# Altium PCB USB2JTAG.PcbDoc (part 1 of 2)
Units mm, origin at the board's own origin, x right, y up, seen from the top; angles counter-clockwise.
Board outline 52 x 33 mm, 2 copper layers (Top Layer, Bottom Layer), stack 1.535 mm thick; 102 components, 81 nets, 369 pads, 123 vias.
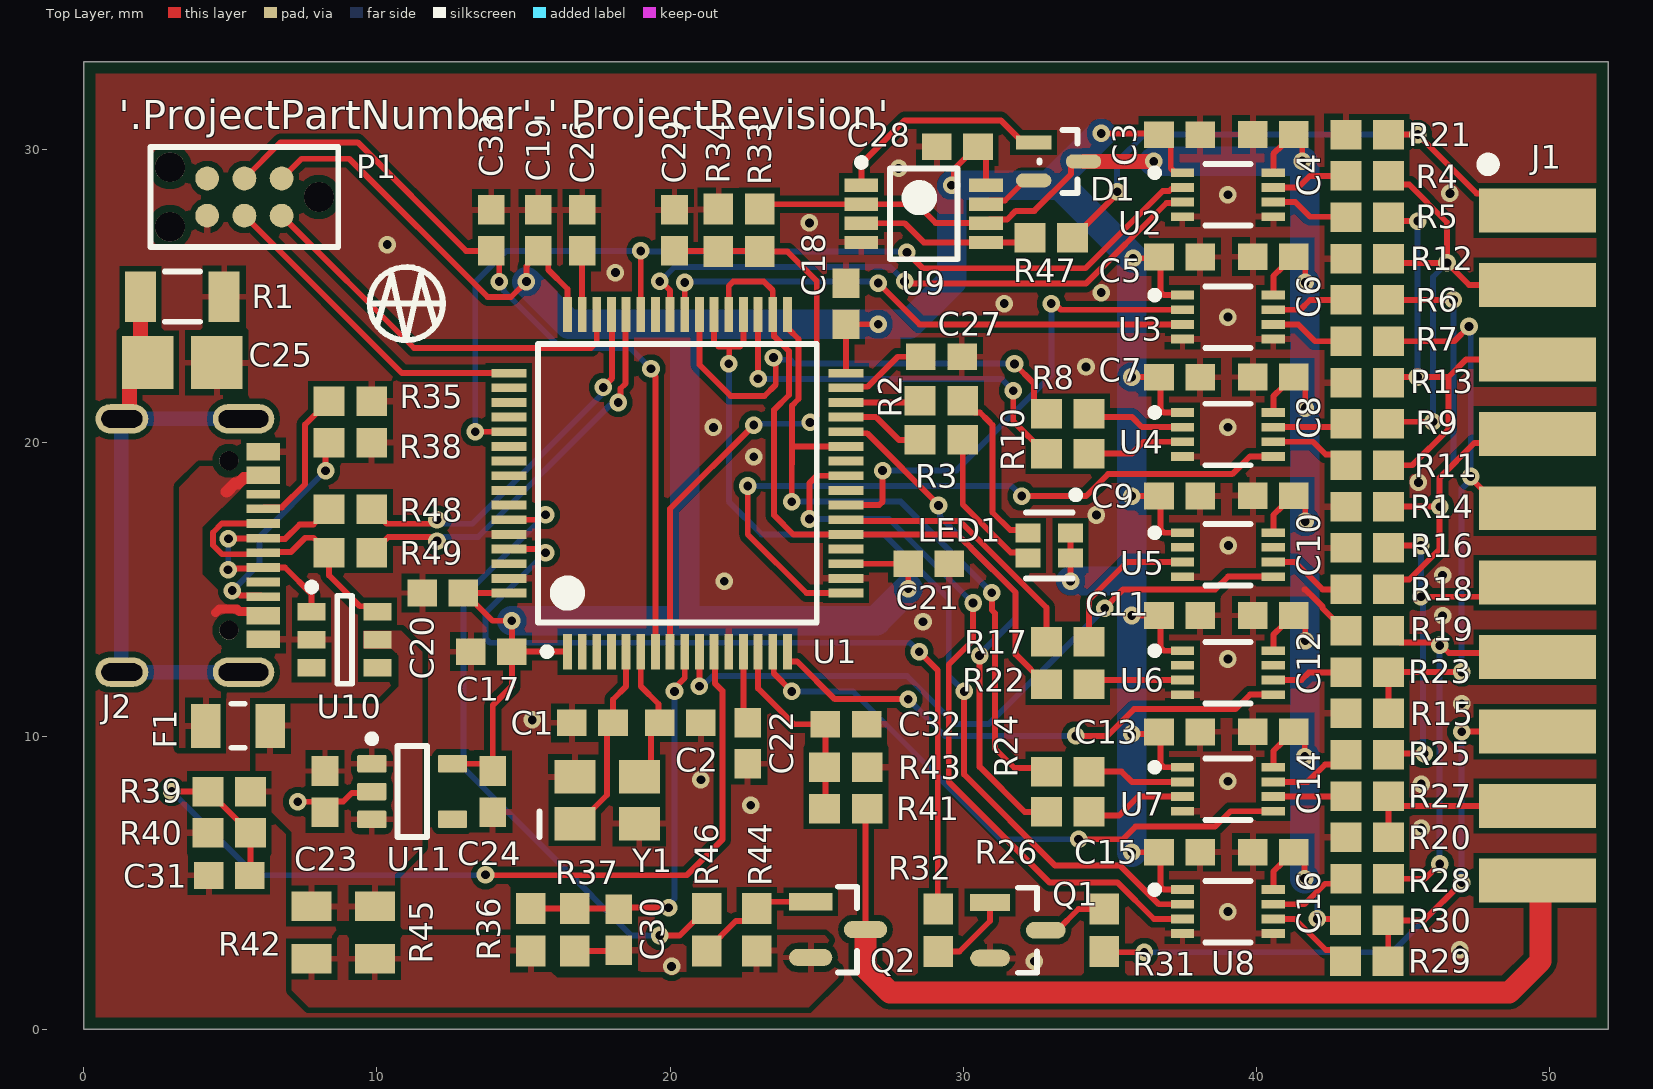
[diagram p0: Top Layer view]
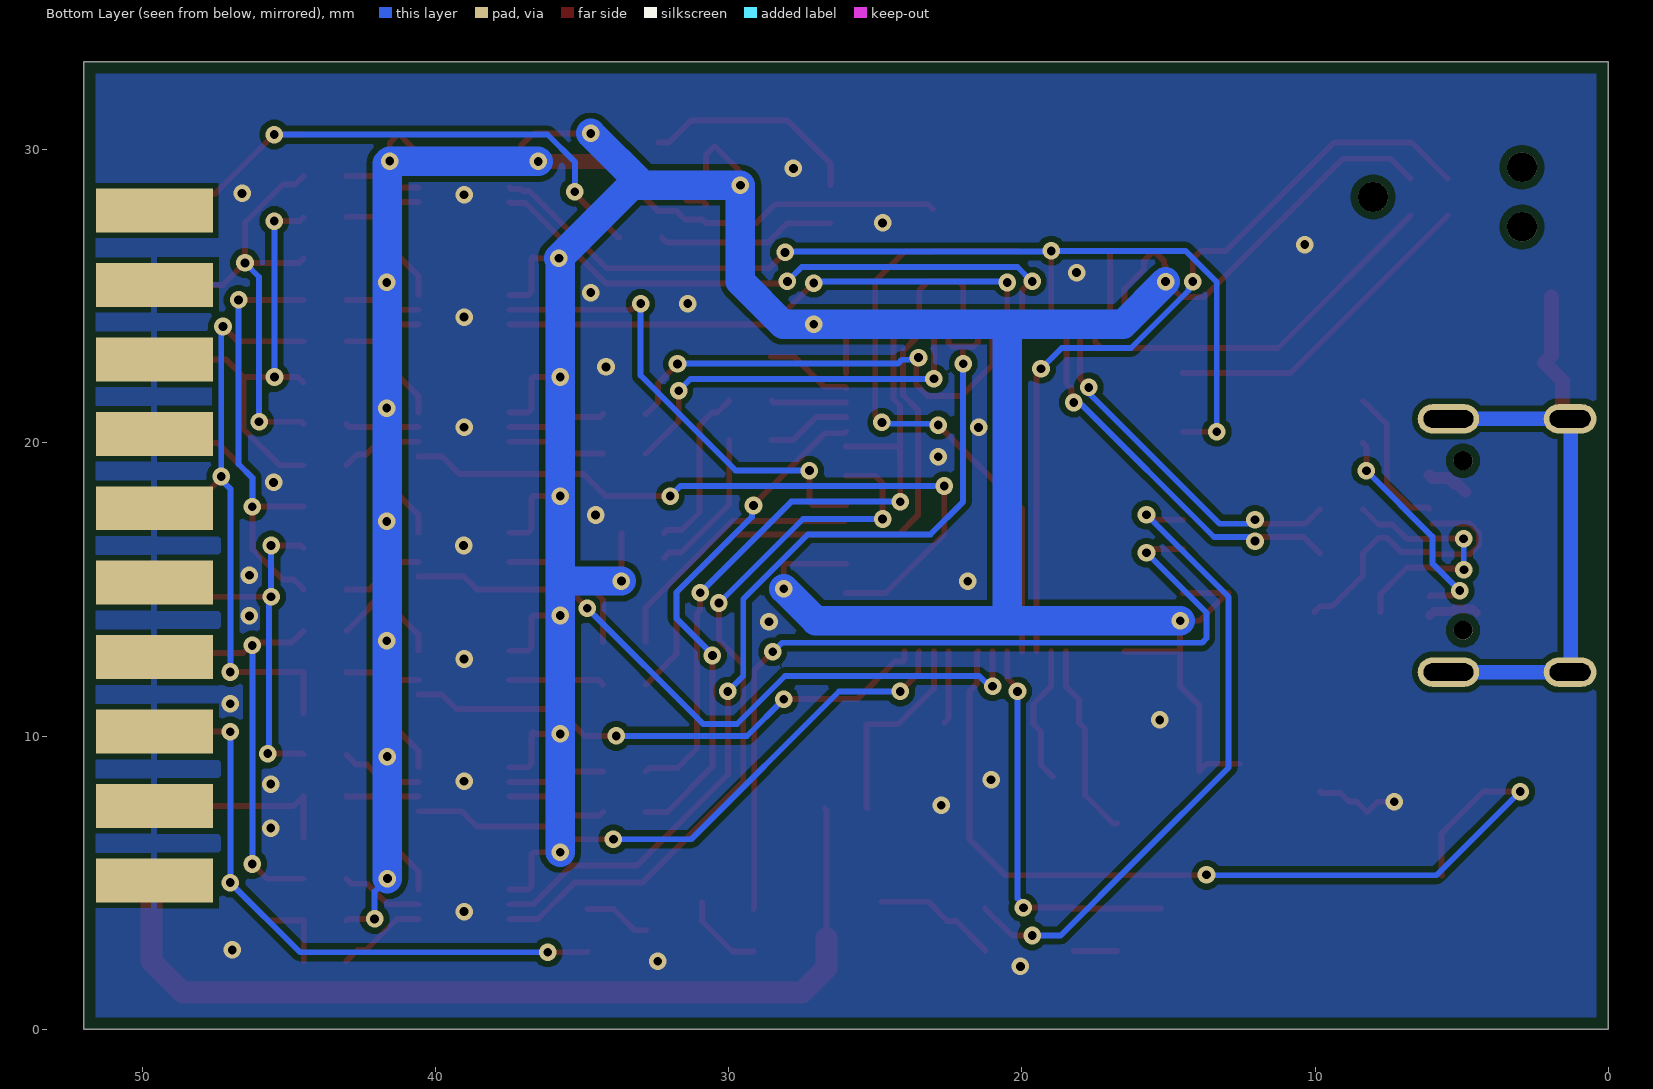
[diagram p1: Bottom Layer view, seen from below]
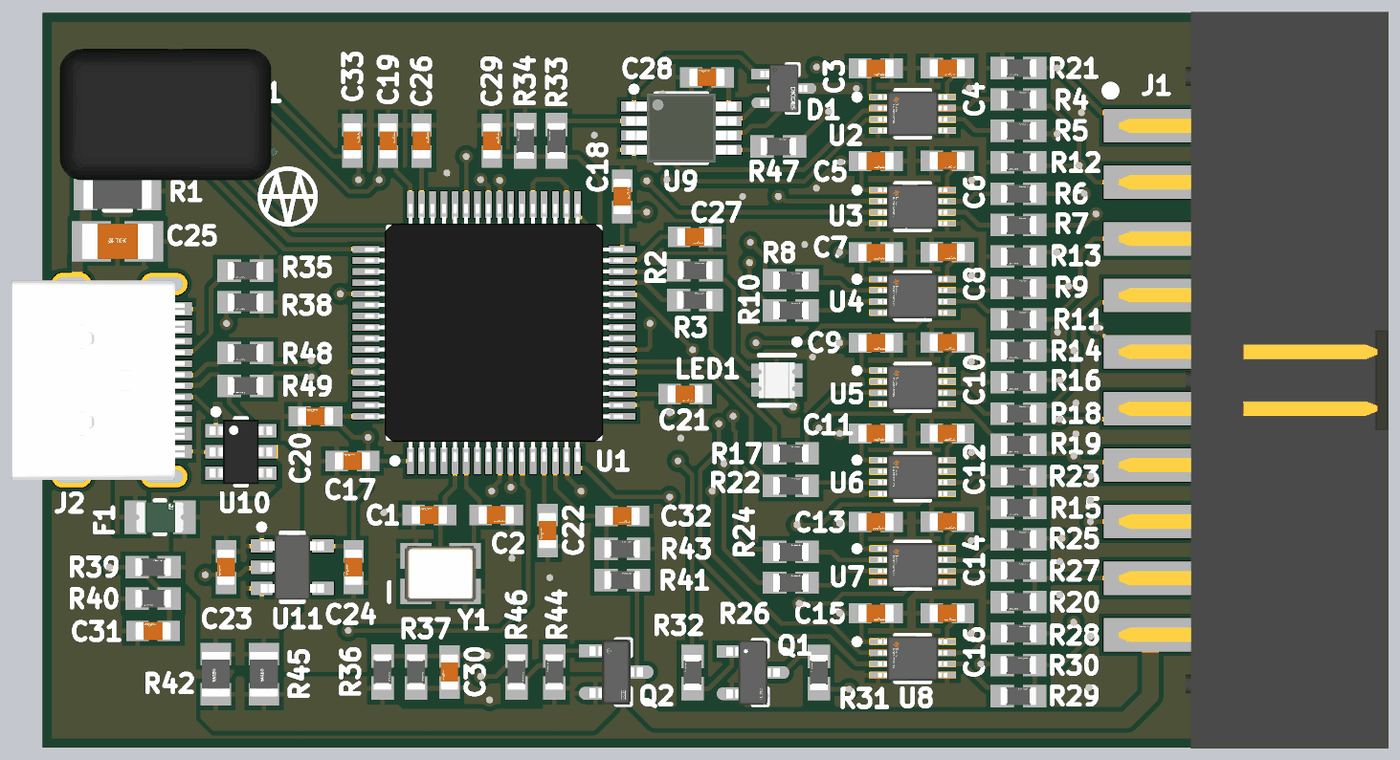
[diagram p2: 3D render of the assembled board from above, using the file's embedded part models]

## Layer stack, top to bottom
Top Solder: solder mask 0.0102, Solder Resist, Dk 3.5
Top Layer: signal copper 0.018
Dielectric 1: core 1.4986, Core-043, Dk 4.3
Bottom Layer: signal copper 0.018
Bottom Solder: solder mask 0.0102, Solder Resist, Dk 3.5

## Board outline
0,0 0,33 52,33 52,0

## Design rules (kind name [scope] priority, off if disabled: settings)
AcuteAngle [All] p1: minimum=3.50000000000000E+0001 checktracksonly=FALSE
BoardOutlineClearance "BoardOutlineClearance 1" [All] p1 off: gap=0.25 ignorepadtopadclearanceinfootprint=FALSE except(0: Arc-SplitContinuation Track-SplitContinuation SMDPad-SplitContinuation THPad-SplitContinuation Via-SplitContinuation Fill-SplitContinuation Poly-SplitContinuation Region-SplitContinuation Text-SplitContinuation) // Milling
BoardOutlineClearance "BoardOutlineClearance 2" [All] p2: gap=0.4 ignorepadtopadclearanceinfootprint=FALSE except(0: Arc-SplitContinuation Track-SplitContinuation SMDPad-SplitContinuation THPad-SplitContinuation Via-SplitContinuation Fill-SplitContinuation Poly-SplitContinuation Region-SplitContinuation Text-SplitContinuation) // V-Cut
Clearance "Clearance-1 1/2 Oz" [All] p1: gap=0.127 ignorepadtopadclearanceinfootprint=FALSE except(0.2: Arc-Fill Arc-Poly Track-Fill Track-Poly SMDPad-SMDPad SMDPad-Fill SMDPad-Poly THPad-Fill THPad-Poly Via-Fill Via-Poly Fill-Fill Fill-Poly Poly-Poly Poly-Region Poly-Text; 0.25: Arc-Hole Track-Hole SMDPad-Hole THPad-Hole Via-Hole Fill-Hole Poly-Hole Region-Hole Text-Hole) // Standart
Clearance "Clearance-2 1/2 Oz" [All] p2 off: gap=0.1 ignorepadtopadclearanceinfootprint=FALSE except(0.15: Arc-Fill Arc-Poly Track-Fill Track-Poly SMDPad-SMDPad SMDPad-Fill SMDPad-Poly THPad-Fill THPad-Poly Via-Fill Via-Poly Fill-Fill Fill-Poly Poly-Poly Poly-Region Poly-Text; 0.25: Arc-Hole Track-Hole SMDPad-Hole THPad-Hole Via-Hole Fill-Hole Poly-Hole Region-Hole Text-Hole) // Advance
Clearance "Clearance-1 1 Oz" [All] p3 off: gap=0.2 ignorepadtopadclearanceinfootprint=FALSE except(0.25: Arc-Hole Track-Hole SMDPad-Hole THPad-Hole Via-Hole Fill-Hole Poly-Hole Region-Hole Text-Hole) // Standart
Clearance "Clearance-2 1 Oz" [All] p4 off: gap=0.15 ignorepadtopadclearanceinfootprint=FALSE except(0.2: Arc-Fill Arc-Poly Track-Fill Track-Poly SMDPad-Fill SMDPad-Poly THPad-Fill THPad-Poly Via-Fill Via-Poly Fill-Fill Fill-Poly Poly-Poly; 0.25: Arc-Hole Track-Hole SMDPad-Hole THPad-Hole Via-Hole Fill-Hole Poly-Hole Region-Hole Text-Hole) // Advance
Clearance "Clearance 2 Oz" [All] p5 off: gap=0.3 ignorepadtopadclearanceinfootprint=FALSE except(0.25: Arc-Hole Track-Hole SMDPad-Hole THPad-Hole Via-Hole Fill-Hole Poly-Hole Region-Hole Text-Hole)
Clearance "Clearance 3 Oz" [All] p6 off: gap=0.35 ignorepadtopadclearanceinfootprint=FALSE except(0.25: Arc-Hole Track-Hole SMDPad-Hole THPad-Hole Via-Hole Fill-Hole Poly-Hole Region-Hole Text-Hole)
DiffPairsRouting "DiffPairsRouting 1/2 Oz" [All] p1: maxlimit=0.254 minlimit=0.1 mostfreqgap=0.254 toplayer_minwidth=0.1 toplayer_maxwidth=0.381 toplayer_prefwidth=0.381 bottomlayer_minwidth=0.1 bottomlayer_maxwidth=0.381 bottomlayer_prefwidth=0.381 maxuncoupledlength=12.7
DiffPairsRouting "DiffPairsRouting 1 Oz" [All] p2 off: maxlimit=0.254 minlimit=0.2 mostfreqgap=0.254 toplayer_minwidth=0.2 toplayer_maxwidth=0.381 toplayer_prefwidth=0.381 bottomlayer_minwidth=0.2 bottomlayer_maxwidth=0.381 bottomlayer_prefwidth=0.381 maxuncoupledlength=12.7
Height [All] p1: minheight=0 maxheight=50 prefheight=12.7
HoleSize "Minimum HoleSize" [IsPad] p1: absolutevalues=TRUE maxlimit=5.9 minlimit=0.6 maxpercent=80.000 minpercent=20.000
HoleSize "Minimum HoleSize VIA 1" [IsVia] p2: absolutevalues=TRUE maxlimit=5.9 minlimit=0.3 maxpercent=80.000 minpercent=20.000 // Standart
HoleSize "Minimum HoleSize VIA 2" [IsVia] p3 off: absolutevalues=TRUE maxlimit=5.9 minlimit=0.2 maxpercent=80.000 minpercent=20.000 // Advance
HoleToHoleClearance Hole2HoleClearance [All] p1: gap=0.25 allowstackedmicrovias=FALSE
MinimumAnnularRing "Minimum AR VIA Standart" [All] p1: minimumring=0.15
MinimumAnnularRing "Minimum AR PAD Standart" [All] p2: minimumring=0.2
MinimumAnnularRing "Minimum AR VIA Advance" [All] p3 off: minimumring=0.1
MinimumAnnularRing "Minimum AR PAD Advance" [All] p4 off: minimumring=0.15
MinimumSolderMaskSliver "SolderMask Bridge Standart" [All] p1: minsoldermaskwidth=0.15 // All Masks
MinimumSolderMaskSliver "SolderMask Bridge Advance" [All] p2 off: minsoldermaskwidth=0.1 // Mask LDI
PlaneClearance "PlaneClearance-1 1/2 Oz" [All] p1: clearance=0.2 // Standart
PlaneClearance "PlaneClearance-2 1/2 Oz" [All] p2 off: clearance=0.15 // Advance
PlaneClearance "PlaneClearance 1 Oz" [All] p3 off: clearance=0.2
PlaneClearance "PlaneClearance 2 Oz" [All] p4 off: clearance=0.3
PlaneClearance "PlaneClearance 3 Oz" [All] p5 off: clearance=0.35
PlaneConnect "TermalConnect-1 1/2 Oz" [All] p1: planeconnectstyle=Relief reliefexpansion=0.2 reliefentries=4 reliefconductorwidth=0.2 reliefairgap=0.2 // Standart
PlaneConnect "TermalConnect-2 1/2 Oz" [All] p2 off: pad.planeconnectstyle=Relief pad.reliefexpansion=0.15 pad.reliefentries=4 pad.reliefconductorwidth=0.15 pad.reliefairgap=0.15 via.planeconnectstyle=Direct via.reliefexpansion=0.15 via.reliefentries=4 via.reliefconductorwidth=0.15 via.reliefairgap=0.15 // Advance
PlaneConnect "TermalConnect-1 1 Oz" [All] p3 off: planeconnectstyle=Relief reliefexpansion=0.2 reliefentries=4 reliefconductorwidth=0.2 reliefairgap=0.2 // Standart
PlaneConnect "TermalConnect-2 1 Oz" [All] p4 off: pad.planeconnectstyle=Relief pad.reliefexpansion=0.15 pad.reliefentries=4 pad.reliefconductorwidth=0.2 pad.reliefairgap=0.2 via.planeconnectstyle=Direct via.reliefexpansion=0.15 via.reliefentries=4 via.reliefconductorwidth=0.15 via.reliefairgap=0.15 // Advance
PlaneConnect "TermalConnect 2 Oz" [All] p5 off: planeconnectstyle=Relief reliefexpansion=0.2 reliefentries=4 reliefconductorwidth=0.3 reliefairgap=0.3 // Standart
PlaneConnect "TermalConnect 3 Oz" [All] p6 off: planeconnectstyle=Relief reliefexpansion=0.2 reliefentries=4 reliefconductorwidth=0.35 reliefairgap=0.35 // Standart
PolygonConnect "PolygonConnect-1 1/2 Oz" [All] p1: thpad.connectstyle=Relief thpad.reliefconductorwidth=0.15 thpad.reliefentries=4 thpad.polygonreliefangle="90 Angle" thpad.airgapwidth=0.2 smdpad.connectstyle=Relief smdpad.reliefconductorwidth=0.2 smdpad.reliefentries=4 smdpad.polygonreliefangle="90 Angle" smdpad.airgapwidth=0.2 via.connectstyle=Direct via.reliefconductorwidth=0.254 via.reliefentries=4 via.polygonreliefangle="90 Angle" via.airgapwidth=0.254 // Standart
PolygonConnect "PolygonConnect-1 1 Oz" [All] p2 off: thpad.connectstyle=Relief thpad.reliefconductorwidth=0.2 thpad.reliefentries=4 thpad.polygonreliefangle="90 Angle" thpad.airgapwidth=0.2 smdpad.connectstyle=Relief smdpad.reliefconductorwidth=0.2 smdpad.reliefentries=4 smdpad.polygonreliefangle="90 Angle" smdpad.airgapwidth=0.2 via.connectstyle=Direct via.reliefconductorwidth=0.254 via.reliefentries=4 via.polygonreliefangle="90 Angle" via.airgapwidth=0.254 // Standart
PolygonConnect "PolygonConnect-2 1/2 Oz" [All] p3 off: thpad.connectstyle=Relief thpad.reliefconductorwidth=0.125 thpad.reliefentries=4 thpad.polygonreliefangle="90 Angle" thpad.airgapwidth=0.15 smdpad.connectstyle=Relief smdpad.reliefconductorwidth=0.125 smdpad.reliefentries=4 smdpad.polygonreliefangle="90 Angle" smdpad.airgapwidth=0.15 via.connectstyle=Direct via.reliefconductorwidth=0.254 via.reliefentries=4 via.polygonreliefangle="90 Angle" via.airgapwidth=0.254 // Advance
PolygonConnect "PolygonConnect-2 1 Oz" [All] p4 off: thpad.connectstyle=Relief thpad.reliefconductorwidth=0.15 thpad.reliefentries=4 thpad.polygonreliefangle="90 Angle" thpad.airgapwidth=0.15 smdpad.connectstyle=Relief smdpad.reliefconductorwidth=0.15 smdpad.reliefentries=4 smdpad.polygonreliefangle="90 Angle" smdpad.airgapwidth=0.15 via.connectstyle=Direct via.reliefconductorwidth=0.254 via.reliefentries=4 via.polygonreliefangle="90 Angle" via.airgapwidth=0.254 // Advance
PolygonConnect "PolygonConnect 2 Oz" [All] p5 off: thpad.connectstyle=Relief thpad.reliefconductorwidth=0.3 thpad.reliefentries=4 thpad.polygonreliefangle="90 Angle" thpad.airgapwidth=0.3 smdpad.connectstyle=Relief smdpad.reliefconductorwidth=0.3 smdpad.reliefentries=4 smdpad.polygonreliefangle="90 Angle" smdpad.airgapwidth=0.3 via.connectstyle=Direct via.reliefconductorwidth=0.254 via.reliefentries=4 via.polygonreliefangle="90 Angle" via.airgapwidth=0.254
PolygonConnect "PolygonConnect 3 Oz" [All] p6 off: thpad.connectstyle=Relief thpad.reliefconductorwidth=0.35 thpad.reliefentries=4 thpad.polygonreliefangle="90 Angle" thpad.airgapwidth=0.35 smdpad.connectstyle=Relief smdpad.reliefconductorwidth=0.35 smdpad.reliefentries=4 smdpad.polygonreliefangle="90 Angle" smdpad.airgapwidth=0.35 via.connectstyle=Direct via.reliefconductorwidth=0.254 via.reliefentries=4 via.polygonreliefangle="90 Angle" via.airgapwidth=0.254
RoutingCorners [All] p1 off: cornerstyle=45-Degree minsetback=2.54 maxsetback=2.54
RoutingVias [All] p1: holewidth=0.3 width=0.6 viastyle="Through Hole" minholewidth=0.2 minwidth=0.4 maxholewidth=5.9 maxwidth=6.4
SilkToSilkClearance Silk2SilkClearance [All] p1 off: silktosilkclearance=0.15
SilkToSolderMaskClearance Silk2SolderMaskClearance [IsPad] p1 off: minsilkscreentomaskgap=0.15 clearancetoexposedcopper=TRUE
SolderMaskExpansion [IsVia] p1: expansion=0.102 istentingtop=TRUE
SolderMaskExpansion SolderMaskExpansion-1 [All] p2: expansion=0.05 istentingtop=FALSE // Standart
SolderMaskExpansion "SolderMaskExpansion LDI" [All] p3 off: expansion=0.025 istentingtop=FALSE // Advance
UnRoutedNet [All] p1: checkbadconnections=TRUE
Width "Width 1/2 Oz" [All] p1: maxlimit=10 minlimit=0.127 preferedwidth=0.2 checkconnectedcopper=TRUE
Width "Width 1 Oz" [All] p2 off: maxlimit=10 minlimit=0.15 preferedwidth=0.2 checkconnectedcopper=TRUE
Width "Width 3 Oz" [All] p3 off: maxlimit=10 minlimit=0.35 preferedwidth=0.4 checkconnectedcopper=TRUE
Width "Width 2 Oz" [All] p4 off: maxlimit=10 minlimit=0.3 preferedwidth=0.35 minimp=50.000000 maximp=50.000000 favimp=50.000000 checkconnectedcopper=TRUE
19 further rules are at their usual default settings.

## Classes and differential pairs
component class USB2JTAG-Power: C23 C24 C25 C28 C29 C30 C31 C32 D1 F1 J2 Q2 R1 R33 R34 R35 R36 R37 R38 R39 R40 R41 R42 R43 R44 R45 R46 R47 R48 R49 U9 U10 U11
component class USB2JTAG-Interfaces: C3 C4 C5 C6 C7 C8 C9 C10 C11 C12 C13 C14 C15 C16 J1 Q1 R4 R5 R6 R7 R8 R9 R10 R11 R12 R13 R14 R15 R16 R17 R18 R19 R20 R21 R22 R23 R24 R25 R26 R27 R28 R29 R30 R31 R32 U2 U3 U4 U5 U6 U7 U8
component class USB2JTAG-MCU: C1 C2 C17 C18 C19 C20 C21 C22 C26 C27 C33 LED1 P1 R2 R3 U1 Y1
differential pair USB_D: +USB_D_P -USB_D_N
differential pair D: +D_P -D_N

## Components (designator, comment, footprint, x,y, rotation, side; value= is the part's Value field where it differs from the comment)
C1 "?uF 6V 0603" FP-GRM188-0_1-e0_2_0_55-IPC_B-NOSILK 17.35,10.452 r180 top
C2 "?uF 6V 0603" FP-GRM188-0_1-e0_2_0_55-IPC_B-NOSILK 20.35,10.452 r0 top
C3 "?uF 6V 0603" FP-GRM188-0_1-e0_2_0_55-IPC_B-NOSILK 37.378,30.506 r0 top
C4 "?uF 6V 0603" FP-GRM188-0_1-e0_2_0_55-IPC_B-NOSILK 40.578,30.517 r0 top
C5 "?uF 6V 0603" FP-GRM188-0_1-e0_2_0_55-IPC_B-NOSILK 37.378,26.34 r0 top
C6 "?uF 6V 0603" FP-GRM188-0_1-e0_2_0_55-IPC_B-NOSILK 40.578,26.351 r0 top
C7 "?uF 6V 0603" FP-GRM188-0_1-e0_2_0_55-IPC_B-NOSILK 37.378,22.237 r0 top
C8 "?uF 6V 0603" FP-GRM188-0_1-e0_2_0_55-IPC_B-NOSILK 40.578,22.248 r0 top
C9 "?uF 6V 0603" FP-GRM188-0_1-e0_2_0_55-IPC_B-NOSILK 37.378,18.184 r0 top
C10 "?uF 6V 0603" FP-GRM188-0_1-e0_2_0_55-IPC_B-NOSILK 40.578,18.195 r0 top
C11 "?uF 6V 0603" FP-GRM188-0_1-e0_2_0_55-IPC_B-NOSILK 37.378,14.112 r0 top
C12 "?uF 6V 0603" FP-GRM188-0_1-e0_2_0_55-IPC_B-NOSILK 40.578,14.112 r0 top
C13 "?uF 6V 0603" FP-GRM188-0_1-e0_2_0_55-IPC_B-NOSILK 37.378,10.137 r0 top
C14 "?uF 6V 0603" FP-GRM188-0_1-e0_2_0_55-IPC_B-NOSILK 40.578,10.148 r0 top
C15 "?uF 6V 0603" FP-GRM188-0_1-e0_2_0_55-IPC_B-NOSILK 37.378,6.037 r0 top
C16 "?uF 6V 0603" FP-GRM188-0_1-e0_2_0_55-IPC_B-NOSILK 40.578,6.037 r0 top
C17 "?uF 6V 0603" FP-GRM188-0_1-e0_2_0_55-IPC_B-NOSILK 13.9,12.878 r180 top
C18 "?uF 6V 0603" FP-GRM188-0_1-e0_2_0_55-IPC_B-NOSILK 26,24.75 r90 top
C19 "?uF 6V 0603" FP-GRM188-0_1-e0_2_0_55-IPC_B-NOSILK 15.5,27.249 r90 top
C20 "?uF 6V 0603" FP-GRM188-0_1-e0_2_0_55-IPC_B-NOSILK 12.247,14.878 r180 top
C21 "?uF 6V 0603" FP-GRM188-0_1-e0_2_0_55-IPC_B-NOSILK 28.825,15.878 r0 top
C22 "?uF 6V 0603" FP-GRM188-0_1-e0_2_0_55-IPC_B-NOSILK 22.65,9.75 r270 top
C23 "?uF 6V 0603" FP-GRM188-0_1-e0_2_0_55-IPC_B-NOSILK 8.227,8.107 r270 top
C24 "?uF 6V 0603" FP-GRM188-0_1-e0_2_0_55-IPC_B-NOSILK 13.953,8.107 r270 top
C25 "2,2nF 250V 1206" FP-C3216-160-0_2-IPC_B-NOSILK 3.362,22.736 r0 top
C26 "?uF 6V 0603" FP-GRM188-0_1-e0_2_0_55-IPC_B-NOSILK 17,27.249 r90 top
C27 "?uF 6V 0603" FP-GRM188-0_1-e0_2_0_55-IPC_B-NOSILK 29.256,22.94 r0 top
C28 "?uF 6V 0603" FP-GRM188-0_1-e0_2_0_55-IPC_B-NOSILK 29.8,30.1 r180 top
C29 "?uF 6V 0603" FP-GRM188-0_1-e0_2_0_55-IPC_B-NOSILK 20.15,27.249 r90 top
C30 "?uF 6V 0603" FP-GRM188-0_1-e0_2_0_55-IPC_B-NOSILK 18.25,3.396 r270 top
C31 "?uF 6V 0603" FP-GRM188-0_1-e0_2_0_55-IPC_B-NOSILK 4.96,5.242 r180 top
C32 "?uF 6V 0603" FP-GRM188-0_1-e0_2_0_55-IPC_B-NOSILK 25.999,10.402 r0 top
C33 "?uF 6V 0603" FP-GRM188-0_1-e0_2_0_55-IPC_B-NOSILK 13.9,27.249 r90 top
D1 "BAT54CW L43" FP-SOT323-IPC_B 33.25,29.6 r0 top value=10pF
F1 "500mA 6V" FP-0805L-MFG 5.266,10.35 r0 top
J1 "JTAG-20PIN" 61202021621-Edge-SMT 53.4,16.5 r270 top
J2 "USB-TYPE-C" KH-TYPE-C-16P-2 6.025,16.5 r270 top
LED1 "LTST-C195TGKRKT" FP-LTST-C19HE1WT-MFG 32.936,16.5 r270 top
P1 "TC2030-NL" TC2030-NL 5.48,28.385 r180 top
Q1 "SS8050" FP-SS8050-G-IPC_B 31.865,3.375 r0 top
Q2 "SS8550 Y2" FP-SOT-23-IPC_B 25.73,3.398 r0 top
R1 "1M 5% 1206" FP-RC1206-IPC_B 3.362,24.986 r0 top
R2 "?R 5% 0603" FP-ERA3A-IPC_B-NOSILK 29.256,21.44 r0 top
R3 "?R 5% 0603" FP-ERA3A-IPC_B-NOSILK 29.256,20.102 r0 top
R4 "?R 5% 0603" FP-ERA3A-IPC_B-NOSILK 43.774,29.107 r0 top
R5 "?R 5% 0603" FP-ERA3A-IPC_B-NOSILK 43.774,27.697 r0 top
R6 "?R 5% 0603" FP-ERA3A-IPC_B-NOSILK 43.774,24.876 r0 top
R7 "?R 5% 0603" FP-ERA3A-IPC_B-NOSILK 43.774,23.466 r0 top
R8 "?R 5% 0603" FP-ERA3A-IPC_B-NOSILK 33.562,20.987 r0 top
R9 "?R 5% 0603" FP-ERA3A-IPC_B-NOSILK 43.774,20.645 r0 top
R10 "?R 5% 0603" FP-ERA3A-IPC_B-NOSILK 33.562,19.637 r0 top
R11 "?R 5% 0603" FP-ERA3A-IPC_B-NOSILK 43.774,19.235 r0 top
R12 "?R 5% 0603" FP-ERA3A-IPC_B-NOSILK 43.774,26.286 r180 top
R13 "?R 5% 0603" FP-ERA3A-IPC_B-NOSILK 43.774,22.056 r180 top
R14 "?R 5% 0603" FP-ERA3A-IPC_B-NOSILK 43.774,17.825 r180 top
R15 "?R 5% 0603" FP-ERA3A-IPC_B-NOSILK 43.774,10.773 r180 top
R16 "?R 5% 0603" FP-ERA3A-IPC_B-NOSILK 43.774,16.415 r180 top
R17 "?R 5% 0603" FP-ERA3A-IPC_B-NOSILK 33.562,13.212 r0 top
R18 "?R 5% 0603" FP-ERA3A-IPC_B-NOSILK 43.774,15.004 r0 top
R19 "?R 5% 0603" FP-ERA3A-IPC_B-NOSILK 43.774,13.594 r180 top
R20 "?R 5% 0603" FP-ERA3A-IPC_B-NOSILK 43.774,6.543 r180 top
R21 "?R 5% 0603" FP-ERA3A-IPC_B-NOSILK 43.774,30.517 r180 top
R22 "?R 5% 0603" FP-ERA3A-IPC_B-NOSILK 33.562,11.762 r0 top
R23 "?R 5% 0603" FP-ERA3A-IPC_B-NOSILK 43.774,12.184 r0 top
R24 "?R 5% 0603" FP-ERA3A-IPC_B-NOSILK 33.562,8.787 r0 top
R25 "?R 5% 0603" FP-ERA3A-IPC_B-NOSILK 43.774,9.363 r0 top
R26 "?R 5% 0603" FP-ERA3A-IPC_B-NOSILK 33.562,7.412 r0 top
R27 "?R 5% 0603" FP-ERA3A-IPC_B-NOSILK 43.774,7.953 r0 top
R28 "?R 5% 0603" FP-ERA3A-IPC_B-NOSILK 43.774,5.132 r0 top
R29 "?R 5% 0603" FP-ERA3A-IPC_B-NOSILK 43.769,2.321 r0 top
R30 "?R 5% 0603" FP-ERA3A-IPC_B-NOSILK 43.767,3.711 r0 top
R31 "?R 5% 0603" FP-ERA3A-IPC_B-NOSILK 34.815,3.375 r90 top
R32 "?R 5% 0603" FP-ERA3A-IPC_B-NOSILK 29.148,3.375 r90 top
R33 "?R 5% 0603" FP-ERA3A-IPC_B-NOSILK 23.05,27.25 r90 top
R34 "?R 5% 0603" FP-ERA3A-IPC_B-NOSILK 21.65,27.249 r90 top
R35 "?R 5% 0603" FP-ERA3A-IPC_B-NOSILK 9.097,21.421 r180 top
R36 "?R 5% 0603" FP-ERA3A-IPC_B-NOSILK 15.25,3.396 r270 top
R37 "?R 5% 0603" FP-ERA3A-IPC_B-NOSILK 16.75,3.396 r270 top
R38 "?R 5% 0603" FP-ERA3A-IPC_B-NOSILK 9.097,20 r180 top
R39 "?R 5% 0603" FP-ERA3A-IPC_B-NOSILK 4.96,8.107 r0 top
R40 "?R 5% 0603" FP-ERA3A-IPC_B-NOSILK 4.96,6.698 r180 top
R41 "?R 5% 0603" FP-ERA3A-IPC_B-NOSILK 25.998,7.527 r0 top
R42 "?R 5% 0805" FP-RC0805-0_6-IPC_B-NOSILK 7.771,3.298 r90 top
R43 "?R 5% 0603" FP-ERA3A-IPC_B-NOSILK 25.998,8.931 r0 top
R44 "?R 5% 0603" FP-ERA3A-IPC_B-NOSILK 22.956,3.398 r90 top
R45 "?R 5% 0805" FP-RC0805-0_6-IPC_B-NOSILK 9.928,3.298 r90 top
R46 "?R 5% 0603" FP-ERA3A-IPC_B-NOSILK 21.25,3.396 r270 top
R47 "?R 5% 0603" FP-ERA3A-IPC_B-NOSILK 33,27 r0 top
R48 "?R 5% 0603" FP-ERA3A-IPC_B-NOSILK 9.097,17.728 r180 top
R49 "?R 5% 0603" FP-ERA3A-IPC_B-NOSILK 9.097,16.25 r180 top
U1 "STM32F205RCT6" STM-LQFP64_V 20.25,18.628 r90 top locked
U2 "74LVC2T45DC,125" FP-DCU0008A-MFG 39.028,28.465 r0 top
U3 "74LVC2T45DC,125" FP-DCU0008A-MFG 39.028,24.29 r0 top
U4 "74LVC2T45DC,125" FP-DCU0008A-MFG 39.028,20.287 r0 top
U5 "74LVC2T45DC,125" FP-DCU0008A-MFG 39.028,16.187 r0 top
U6 "74LVC2T45DC,125" FP-DCU0008A-MFG 39.028,12.162 r0 top
U7 "74LVC2T45DC,125" FP-DCU0008A-MFG 39.028,8.187 r0 top
U8 "74LVC2T45DC,125" FP-DCU0008A-MFG 39.028,4.012 r0 top
U9 "COS358MR" MSOP-8 28.65,27.815 r0 top
U10 "TPNUP4201MR6T1G" ONSC-TSOP-6-318G-02_V 8.899,13.285 r0 top
U11 "3V3 100mA" DBV0005A_N 11.203,8.107 r0 top
Y1 "12MHz 9pF" FP-TSX-3225-MFG 17.85,7.811 r0 top

## Footprints (in the part's own frame and the unit in brackets; to place one, negate y for a bottom-side part, rotate by r counter-clockwise, add the part's x,y. Pads: shape width x height; smd on the part's side, far side on the other; paste and mask are expansions set on the pad)
61202021621-Edge-SMT [mm] "20 pins, edge SMT gold plating"
  rect 1.5x4 smd: 1(-11.43,-3.81) 3(-8.89,-3.81) 5(-6.35,-3.81) 7(-3.81,-3.81) 9(-1.27,-3.81) 11(1.27,-3.81) 13(3.81,-3.81) 15(6.35,-3.81) 17(8.89,-3.81) 19(11.43,-3.81)
  rect 1.5x4 smd far side: 2(-11.43,-3.81) 4(-8.89,-3.81) 6(-6.35,-3.81) 8(-3.81,-3.81) 10(-1.27,-3.81) 12(1.27,-3.81) 14(3.81,-3.81) 16(6.35,-3.81) 18(8.89,-3.81) 20(11.43,-3.81)
  silkscreen extent -13.2,-5.7 -12.8,-5.3, body extent -16.53,-5.13 16.53,6.97, height 3.42
DBV0005A_N [mm] "SOT23, 5-Leads, Body 3.05x1.75mm, Pitch 0.95mm, IPC Medium Density"
  rrect17% 1x0.6 smd: 1(-1.375,0.95) 2(-1.375,0) 3(-1.375,-0.95) 4(1.375,-0.95) 5(1.375,0.95)
  silkscreen extent -1.5,-1.55 0.5,1.92, body extent -1.42,-1.46 1.42,1.46, height 1.08
FP-0805L-MFG [mm]
  rect 1x1.5 smd paste+0 mask+0: 1(-1.1,0) 2(1.1,0)
  silkscreen extent -0.23,-0.75 0.23,0.75, body extent -1.7,-0.85 1.7,0.85, height 0.25
FP-C3216-160-0_2-IPC_B-NOSILK [mm]
  rect 1.754x1.806 smd paste+0 mask+0: 1(-1.176,0) 2(1.176,0)
  body extent -2.3,-1.15 2.3,1.15, height 0.25
FP-DCU0008A-MFG [mm]
  rect 0.8x0.3 smd paste-1000 mask+0: 1(-1.55,0.75) 2(-1.55,0.25) 3(-1.55,-0.25) 4(-1.55,-0.75) 5(1.55,-0.75) 6(1.55,-0.25) 7(1.55,0.25) 8(1.55,0.75)
  silkscreen extent -2.62,-1.05 0.78,1.05, body extent -2.05,-1.3 2.05,1.3, height 0.25
FP-ERA3A-IPC_B-NOSILK [mm]
  rect 1.055x1.006 smd paste+0 mask+0: 1(-0.726,0) 2(0.726,0)
  body extent -1.5,-0.75 1.5,0.75, height 0.25
FP-GRM188-0_1-e0_2_0_55-IPC_B-NOSILK [mm]
  rect 1.008x0.912 smd paste+0 mask+0: 1(-0.702,0) 2(0.702,0)
  body extent -1.46,-0.71 1.46,0.71, height 0.25
FP-LTST-C19HE1WT-MFG [mm]
  rect 0.65x0.85 smd paste+0 mask+0: 1(-0.425,0.725) 2(0.425,0.725) 3(0.425,-0.725) 4(-0.425,-0.725)
  silkscreen extent -1.85,-0.8 1.12,1.03, body extent -0.95,-1.25 0.95,1.25, height 0.25
FP-RC0805-0_6-IPC_B-NOSILK [mm]
  rect 1.008x1.362 smd paste+0 mask+0: 1(-0.902,0) 2(0.902,0)
  body extent -1.66,-0.93 1.66,0.93, height 0.25
FP-RC1206-IPC_B [mm]
  rect 1.058x1.712 smd paste+0 mask+0: 1(-1.427,0) 2(1.427,0)
  silkscreen extent -0.6,-0.86 0.6,0.86, body extent -2.21,-1.11 2.21,1.11, height 0.25
FP-SOT323-IPC_B [mil]
  rect 47.65x18.73 smd paste+0 mask+0: 1(-33.5,25.59)
  rrect100% 47.65x18.73 smd paste+0 mask+0: 2(-33.5,-25.59) 3(33.5,0)
  silkscreen extent -26,-42 26,42, body extent -67,-52 67,52, height 10
FP-SOT-23-IPC_B [mm]
  rect 1.474x0.585 smd paste+0 mask+0: 1(-0.935,0.95)
  rrect100% 1.474x0.585 smd paste+0 mask+0: 2(-0.935,-0.95) 3(0.935,0)
  silkscreen extent 0,-1.46 0.65,1.46, body extent -1.92,-1.71 1.92,1.71, height 0.25
FP-SS8050-G-IPC_B [mm]
  rect 1.357x0.572 smd paste+0 mask+0: 1(-0.951,0.95)
  rrect100% 1.357x0.572 smd paste+0 mask+0: 2(-0.951,-0.95) 3(0.951,0)
  silkscreen extent 0,-1.45 0.65,1.45, body extent -1.88,-1.7 1.88,1.7, height 0.25
FP-TSX-3225-MFG [mm]
  rect 1.4x1.15 smd paste+0 mask+0: 1(-1.1,-0.8) 2(1.1,-0.8) 3(1.1,0.8) 4(-1.1,0.8)
  silkscreen extent -2.3,-1.25 -2.3,-0.38, body extent -1.9,-1.48 1.9,1.48, height 0.25
KH-TYPE-C-16P-2 [mm] "USB type-c connector"
  rect 0.6x1.15 smd: A1-B12(-3.2,0.1) A4-B9(-2.4,0.1) B1-A12(3.2,0.1) B4-A9(2.4,0.1)
  rect 0.3x1.15 smd: A5(-1.25,0.1) A6(-0.25,0.1) A7(0.25,0.1) A8(1.25,0.1) B5(1.75,0.1) B6(0.75,0.1) B7(-0.75,0.1) B8(-1.75,0.1)
  round 0.65 hole 0.65 unplated: H(-2.89,-1.075) H(2.89,-1.075)
  oval 1x2.1 hole 0.6 slot 1.7 at 90 deg: SH1(-4.32,-0.575) SH2(4.32,-0.575)
  oval 1x1.8 hole 0.6 slot 1.4 at 90 deg: SH3(-4.32,-4.725) SH4(4.32,-4.725)
  body extent -4.47,-7.4 4.47,0.35, height 3.26
MSOP-8 [mm] "TSOP, 8-Leads, Body 3,00x3,00mm, Pitch 0,65mm, IPC High Density"
  rect 1.15x0.45 smd: 1(-2.125,0.975) 2(-2.125,0.325) 3(-2.125,-0.325) 4(-2.125,-0.975) 5(2.125,-0.975) 6(2.125,-0.325) 7(2.125,0.325) 8(2.125,0.975)
  silkscreen extent -2.25,-1.55 1.15,1.87, body extent -2.47,-1.55 2.47,1.55, height 1.1
ONSC-TSOP-6-318G-02_V [mm] "SOP, 6-Leads, Body 3x1.5mm, Pitch 0.95mm"
  rect 0.95x0.6 smd: 1(-1.125,0.95) 2(-1.125,0) 3(-1.125,-0.95) 4(1.125,-0.95) 5(1.125,0) 6(1.125,0.95)
  silkscreen extent -1.25,-1.5 0.25,1.92, body extent -1.4,-1.45 1.4,1.45, height 1.45
STM-LQFP64_V [mm] "Thin QFP, 64-Leads, Body 10x10mm, Pitch 0.5mm, ST Recommended"
  rect 1.2x0.3 smd: 1(-5.75,3.75) 2(-5.75,3.25) 3(-5.75,2.75) 4(-5.75,2.25) 5(-5.75,1.75) 6(-5.75,1.25) 7(-5.75,0.75) 8(-5.75,0.25) 9(-5.75,-0.25) 10(-5.75,-0.75) 11(-5.75,-1.25) 12(-5.75,-1.75) 13(-5.75,-2.25) 14(-5.75,-2.75) 15(-5.75,-3.25) 16(-5.75,-3.75) 33(5.75,-3.75) 34(5.75,-3.25) 35(5.75,-2.75) 36(5.75,-2.25) 37(5.75,-1.75) 38(5.75,-1.25) 39(5.75,-0.75) 40(5.75,-0.25) 41(5.75,0.25) 42(5.75,0.75) 43(5.75,1.25) 44(5.75,1.75) 45(5.75,2.25) 46(5.75,2.75) 47(5.75,3.25) 48(5.75,3.75)
  rect 0.3x1.2 smd: 17(-3.75,-5.75) 18(-3.25,-5.75) 19(-2.75,-5.75) 20(-2.25,-5.75) 21(-1.75,-5.75) 22(-1.25,-5.75) 23(-0.75,-5.75) 24(-0.25,-5.75) 25(0.25,-5.75) 26(0.75,-5.75) 27(1.25,-5.75) 28(1.75,-5.75) 29(2.25,-5.75) 30(2.75,-5.75) 31(3.25,-5.75) 32(3.75,-5.75) 49(3.75,5.75) 50(3.25,5.75) 51(2.75,5.75) 52(2.25,5.75) 53(1.75,5.75) 54(1.25,5.75) 55(0.75,5.75) 56(0.25,5.75) 57(-0.25,5.75) 58(-0.75,5.75) 59(-1.25,5.75) 60(-1.75,5.75) 61(-2.25,5.75) 62(-2.75,5.75) 63(-3.25,5.75) 64(-3.75,5.75)
  silkscreen extent -5.87,-4.75 4.75,4.75, body extent -5.79,-5.79 5.79,5.79, height 1
TC2030-NL [mil]
  rrect100% 32x32 smd: 1(-50,-25) 2(-50,25) 3(0,-25) 4(0,25) 5(50,-25) 6(50,25)
  round 40 hole 40 unplated: M1(-100,0) M3(100,-40)
  round 40 hole 40 unplated paste+0: M2(100,40)
  silkscreen extent -126,-67 126,67, body extent -259,-118 186,114, height 1035

## Part data
C1 C2 C3 C4 C5 C6 C7 C8 C9 C10 C11 C12 C13 C14 C15 C16 C17 C18 C19 C20 C21 C22 C23 C24 C26 C27 C28 C29 C30 C31 C32 C33: library part CAP0603
C25: library part CAP1206
D1: library part CMP-12790-000028-1, "DIODE ARRAY SCHOTTKY 30V SOT323", Average Rectified Current=200mA, Capacitance=10pF, Case/Package=SOT-323, Forward Voltage=1V, Manufacturer=CBI, Max Forward Surge Current (Ifsm)=600mA, Max Junction Temp=+125°C, Max Operating Temperature=125°C, Max Power Dissipation=200mW, Max Repetitive Reverse Voltage=30V, Max Reverse Current=2uA, Min Operating Temperature=-65°C, Package=SOT323, Package Quantity=3000, Supplier Part Number 1=C2828433, Temperature="-65°C to +125°C", Automotive=No, Category=Diode, ComponentLink2Description=Datasheet, ComponentLink2URL=https://datasheet.lcsc.com/lcsc/2105241831_CBI-BAT54CW-L43_C2828433.pdf, Contact Plating=Tin,Matte, Current Rating=200mA, Device Class L1="Discrete Semiconductors", Device Class L2=Diodes, Device Class L3="Schottky Diodes", Digikey Description="DIODE ARRAY SCHOTTKY 30V SOT323", Element Configuration="Common Cathode", Footprint Url=https://www.diodes.com/assets/Package-Files/SOT323.pdf, Forward Current=200mA, Height=1.1mm, Lead Free=Yes, Length=2.2mm, Manufacturer Part Number="BAT54CW L43", Max Repetitive Reverse Voltage (Vrrm)=30V, Max Reverse Voltage (DC)=30V, Max Surge Forward Current=600mA, Mount="Surface Mount", Mouser Description="Schottky Diodes & Rectifiers 30V 200mW", Number of Pins=3, Octopart=https://octopart.com/bat54cw-7-f-diodes+inc.-14415612, Packaging="Tape and Reel", Peak Non-Repetitive Surge Current=600mA, Peak Reverse Current=2uA, Power Dissipation=200mW, Power Rating=200mW, Pricing 1="3000=0,04270, 6000=0,02370, 15000=0,02340, 30000=0,02320, 75000=0,02060 (USD)", Radiation Hardening=No, Reverse Recovery Time=5ns, Reverse Voltage=30V, RoHS=TRUE, RoHS Compliant=Yes, Series=-, Standoff Height=0mm, Stock 1=96000, Supplier 1=LCSC, Temperature Range High=+125°C, Temperature Range Low=-65°C, Termination=SMD/SMT, Voltage Rating (DC)=30V, Weight=0.000212oz, Width=1.35mm
F1: library part CMP-08606-000023-1, "6V 500mA 100A 1A 100ms 0805 Resettable Fuses ROHS", Case/Package=0805, Manufacturer=Brightking, Manufacturer Part Number=SMD0805B050TF, Supplier Part Number 1=C269104, ComponentLink1Description=Datasheet, ComponentLink1URL=https://datasheet.lcsc.com/lcsc/1808280424_Brightking-SMD0805B050TF_C269104.pdf, Supplier 1=LCSC
J1: "Male Box Header WR-BHD, THT, Vertical, pitch 2.54 mm, 20 pins", Color=Black, Contact Resistance=20mOhm, Current Rating=3A, Flammability Rating="UL94 V-0", Insulation Resistance=1GR, Manufacturer="Wurth Elektronik", Manufacturer Part Number=61202021621, Max Operating Temperature=125°C, Min Operating Temperature=-40°C, Operating Temperature=-40to125degC, Package Quantity=160, Supplier Part Number 1=1642021, Voltage Rating=250V, Withstanding Voltage=500VAC, Working Voltage=250VAC, Category="Headers and Wire Housings", ComponentLink1Description=https://datasheet.ciiva.com/731/6120xx21621-731346.pdf?src-supplier=Digi-Key, ComponentLink1URL=https://datasheet.ciiva.com/731/6120xx21621-731346.pdf?src-supplier=Digi-Key, Connector Type="Male Pin", Contact Gender=Male, Contact Material="Copper Alloy,Copper", Contact Plating=Gold, Contact Type="Male Pin", Datasheet URL=https://katalog.we-online.de/em/datasheet/6120xx21621.pdf, Gender=Male, Height=8.85mm, Housing Material=PBT, Insulation=Insulated, Length=33.06mm, Manufacturer URL=http://www.we-online.de, Mount="Through Hole", Mounting Technology=THT, Number of Contacts=20, Number of Positions=20, Number of Rows=2, Orientation=Vertical, Package Reference=61202021621, Packaging=Tray, Part Number=61202021621, Pin Number=20, Pitch=2.54mm, Pricing 1="1=0,93000, 10=0,84200, 100=0,66700, 500=0,65400, 1000=0,64000, 2500=0,62700 (EUR)", Published Date=August2018, Publisher=WurthElektronik, REACH SVHC=Unknown, RoHS=Yes, RoHS Compliant=Yes, Row Spacing=0.1inch, Series=WR-BHD, Stock 1=1948, Supplier 1=Farnell, Termination="Through Hole", Width=33.06mm
J2: "CONN USB 2.0 TYPE-C R/A SMT", Manufacturer="Shenzhen Kinghelm Elec", Manufacturer Part Number=KH-TYPE-C-16P, Supplier Part Number 1=C709357, ComponentLink2Description=Datasheet, ComponentLink2URL=https://datasheet.lcsc.com/lcsc/2009111434_Shenzhen-Kinghelm-Elec-KH-TYPE-C-16P_C709357.pdf, Number of Contacts=16, Supplier 1=LCSC
LED1: "LED Bi-Color Green/Red 525nm/631nm Chip LED 4-Pin SMD T/R", Case/Package=0606, Color=Green,Red, Forward Voltage=2V, Lens Color=Colorless, Manufacturer="Vishay Lite-On", Supplier Part Number 1=C479082, Test Current=20mA, Category=LEDs, ComponentLink1Description=https://datasheet.ciiva.com/29562/s-110-ltst-c195tgkfkt-29562848.pdf?src-supplier=Digi-Key, ComponentLink1URL=https://datasheet.ciiva.com/29562/s-110-ltst-c195tgkfkt-29562848.pdf?src-supplier=Digi-Key, ComponentLink2Description="Supplier datasheet", ComponentLink2URL=https://datasheet.lcsc.com/lcsc/2108171530_Lite-On-LTST-C195TGKRKT_C479082.pdf, Dominant Wavelength=631nm, Height=0.55mm, Lead Free="Lead Free", Length=1.6mm, Lens Style=Diffused,Colorless,Rectangular, Lens Transparency=Clear, Luminous Intensity=196mcd, Manufacturer Part Number=LTST-C195TGKRKT, Mount="Surface Mount", Number of LEDs=2, Number of Pins=4, Packaging="Tape and Reel", Pricing 1="8000=0,09685, 16000=0,09432, 24000=0,08989, 40000=0,08735, 80000=0,08546 (USD)", RoHS=Yes, RoHS Compliant=Yes, Supplier 1=LCSC, Viewing Angle=130°, Width=1.5mm
Q1: library part CMP-20235-000001-1, "100nA 25V 300mW 1.5A 200@100mA,1V 100MHz 500mV@800mA,80mA NPN +150℃@(Tj) SOT-23(SOT-23-3) Bipolar Transistors - BJT ROHS", Case/Package=SOT-23-3, Manufacturer=JCST, Supplier Part Number 1=C2150, ComponentLink1Description=datasheet, ComponentLink1URL=https://datasheet.lcsc.com/lcsc/1811052004_Jiangsu-Changjing-Electronics-Technology-Co---Ltd--SS8050_C2150.pdf, Manufacturer Part Number=SS8050, Supplier 1=LCSC
Q2: library part CMP-56214-000002-1, "100nA 25V 300mW 1.5A 200@100mA,1V 100MHz 500mV@800mA,80mA PNP +150℃@(Tj) SOT-23(SOT-23-3) Bipolar Transistors - BJT ROHS", Case/Package=SOT-23, Manufacturer=JCST, Supplier Part Number 1=C8542, ComponentLink1Description=datasheet, ComponentLink1URL=https://datasheet.lcsc.com/lcsc/1810161212_Jiangsu-Changjing-Electronics-Technology-Co---Ltd--SS8550-Y2_C8542.pdf, Manufacturer Part Number="SS8550 Y2", Supplier 1=LCSC
R1: library part RES1206
R2 R3 R4 R5 R6 R7 R8 R9 R10 R11 R12 R13 R14 R15 R16 R17 R18 R19 R20 R21 R22 R23 R24 R25 R26 R27 R28 R29 R30 R31 R32 R33 R34 R35 R36 R37 R38 R39 R40 R41 R43 R44 R46 R47 R48 R49: library part RES0603
R42 R45: library part RES0805
U1: "High-performance ARM Cortex-M3 MCU with 256 Kbytes Flash, 120 MHz CPU, ART Accelerator", Case/Package=LQFP, Frequency=120MHz, Manufacturer=STMicroelectronics, Max Operating Temperature=85°C, Max Power Dissipation=444mW, Max Supply Voltage=3.6V, Min Operating Temperature=-40°C, Min Supply Voltage=1.8V, Package Quantity=160, Supplier Part Number 1=7958647, Category=Microcontrollers, ComponentLink1Description="Manufacturer URL", ComponentLink1URL=http://www.st.com/web/en/home.html, ComponentLink2Description=Datasheet, ComponentLink2URL=http://www.st.com/st-web-ui/static/active/en/resource/technical/document/datasheet/CD00237391.pdf, ComponentLink3Description="Package Specification", ComponentLink3URL=http://www.st.com/st-web-ui/static/active/en/resource/technical/document/datasheet/DM00037051.pdf, ComponentLink4Description=https://datasheet.ciiva.com/8055/1776949-8055000.pdf?src-supplier=Element14, ComponentLink4URL=https://datasheet.ciiva.com/8055/1776949-8055000.pdf?src-supplier=Element14, ComponentLink5Description=https://datasheet.ciiva.com/16491/cd00237391-16491001.pdf?src-supplier=Future+Electronics, ComponentLink5URL=https://datasheet.ciiva.com/16491/cd00237391-16491001.pdf?src-supplier=Future+Electronics, ComponentLink6Description=https://datasheet.ciiva.com/48687/001075498-da-01-en-mcu-256kb-stm32f205rct6-lqfp-64-stm-48687468.pdf?src-supplier=Conrad, ComponentLink6URL=https://datasheet.ciiva.com/48687/001075498-da-01-en-mcu-256kb-stm32f205rct6-lqfp-64-stm-48687468.pdf?src-supplier=Conrad, Core Architecture=ARM, Data Bus Width=32b, Height=1.45mm, Interface=SDIO,I2C,SPI,USB,CAN,IrDA,MMC,UART,USART,LIN,I2S, Lead Free="Lead Free", Length=10.2mm, Manufacturer Part Number=STM32F205RCT6, Max Frequency=120MHz, Memory Size=256KB, Memory Type=FLASH, Number of ADC Channels=16, Number of Ethernet Channels=1, Number of I2C Channels=3, Number of I/Os=51, Number of Pins=64, Number of Programmable I/O=16, Number of PWM Channels=2, Number of SPI Channels=3, Number of Timers/Counters=14, Number of UART Channels=2, Number of USB Channels=2, Oscillator Type=Internal, Packaging=Tray, Peripherals="Brown-out Detect/Reset,POR,PWM,WDT,DMA,LCD,I2C", Pricing 1="5=12,81000, 10=11,58000, 25=11,05600, 100=9,59400, 250=9,13400 (GBP)", Radiation Hardening=No, RAM Size=100KB, REACH SVHC="No SVHC", RoHS=Yes, Stock 1=3, Supplier 1=RSComponents, Watchdog Timer=Yes, Width=10.2mm
U2 U3 U4 U5 U6 U7 U8: library part 74LVC2T45DC, "1.2V~5.5V Tri-State，Unidirectional Voltage Level Translators -40℃~+125℃ 1.2V~5.5V Bi-Directional Voltage Levels 1 2 420Mbps VSSOP-8 Translators / Level Shifters ROHS", Case/Package=VSSOP-8, Manufacturer=Nexperia, Supplier Part Number 1=C730237, ComponentLink1Description=Datasheet, ComponentLink1URL=https://datasheet.lcsc.com/lcsc/2201131100_Nexperia-74LVC2T45DC-125_C730237.pdf, Manufacturer Part Number=74LVC2T45DC,125, Supplier 1=LCSC
U9: library part "OPAMP 2 CIRCUIT", "IC OPAMP GP 2 CIRCUIT 8SOIC", Case/Package=MSOP-8, Manufacturer=COSINE, Supplier Part Number 1=C693058, ComponentLink1Description=Datasheet, ComponentLink1URL=https://datasheet.lcsc.com/lcsc/2006301914_COSINE-COS358MR_C693058.pdf, Manufacturer Part Number=COS358MR, Supplier 1=LCSC
U10: library part NUP4201, "SOT-23-6 ESD Protection Devices ROHS", Case/Package=SOT23-6, Manufacturer="TECH PUBLIC", Supplier Part Number 1=C587156, ComponentLink1Description=Datasheet, ComponentLink1URL=https://datasheet.lcsc.com/lcsc/2108131930_TECH-PUBLIC-TPNUP4201MR6T1G_C587156.pdf, Manufacturer Part Number=TPNUP4201MR6T1G, Supplier 1=LCSC
U11: library part CMP-0394-00641-2, "350mA 320mV@(200mA) Fixed 3.3V~3.3V Positive 1 18V SOT-23-5 Linear Voltage Regulators (LDO) ROHS", Case/Package=SOT-23-5, Manufacturer="MICRONE(Nanjing Micro One Elec)", Manufacturer Part Number=ME6215C33M5G, Supplier Part Number 1=C84119, ComponentLink2Description=datasheet, ComponentLink2URL=https://datasheet.lcsc.com/lcsc/1809201023_MICRONE-Nanjing-Micro-One-Elec-ME6215C33M5G_C84119.pdf, Supplier 1=LCSC
Y1: library part CMP-36405-000013-1, Case/Package=SMD3225-4P, ESR (Equivalent Series Resistance)=60R, Frequency=12MHz, Load Capacitance=9pF, Manufacturer="TAE(Zhejiang Abel Elec)", Manufacturer Part Number=TXM12M0004322CBCDO00T, Supplier Part Number 1=C362368, Category=Crystals, ComponentLink1Description=Datasheet, ComponentLink1URL=https://datasheet.lcsc.com/lcsc/1912111437_TAE-Zhejiang-Abel-Elec-TXM12M0004322CBCDO00T_C362368.pdf, Supplier 1=LCSC

## Via types
v1: diameter 0.6, hole 0.3, Top Layer to Bottom Layer, tented both sides, 123 vias

## Nets (pads, with @x,y where several pads share a name; then routed paths per layer and width w, separated by ;. In a path a pad name is that pad's centre, name@x,y a point inside that pad or via, vN(x,y) a via of type N, cw(c..) or ccw(c..) an arc to the next point about the centre after c; other vN are vias at no path point)
+3V3: C3.1 C5.1 C7.1 C9.1 C11.1 C13.1 C15.1 C17.1 C18.1 C19.1 C20.1 C21.1 C24.1 C28.1 LED1.1 LED1.2 P1.1 U1.1 U1.19 U1.32 U1.48 U1.64 U2.1 U3.1 U4.1 U5.1 U6.1 U7.1 U8.1 U9.8 U11.5 | length 133.6
  Top Layer w0.2: P1.1 7.424,29.694 9.056,29.694 13.776,24.974 14.574,24.974 v1(15.1,25.5) 15.1,26.026 15.144,26.07 15.144,26.192 C19.1 15.843,26.204 15.843,25.907 16.5,25.25 U1.48 ; U11.5 13.704,9.057 C24.1 13.953,11.049 14.602,11.698 C17.1 ; C20.1 C20.1@12.997,14.878 ; U1.64 C20.1@12.997,14.878 ; U1.1 C17.1 ; U1.19 C21.1 v1(28.123,15.028) ; U1.32 C18.1 v1(27.1,24.048) ; v1(29.602,28.79) 29.679,28.867 29.679,29.325 30.454,30.1 C28.1 30.775,29.827 U9.8 ; v1(33.661,15.287) LED1.2 LED1.1 ; v1(34.706,30.556) 36.626,30.556 C3.1 36.722,30.506 37.078,30.15 37.078,29.365 37.228,29.215 U2.1 ; v1(35.75,6.037) C15.1 36.724,5.988 36.724,4.879 36.841,4.762 U8.1 ; v1(35.75,10.074) 36.614,10.074 C13.1 36.724,10.088 36.724,9.054 36.841,8.937 U7.1 ; v1(35.75,14.112) C11.1 36.724,14.063 36.724,13.029 36.841,12.912 U6.1 ; v1(35.75,18.184) C9.1 36.724,18.136 36.724,17.054 36.841,16.937 U5.1 ; v1(35.75,22.248) 36.665,22.248 36.724,22.188 36.724,21.154 36.841,21.037 U4.1 ; v1(35.793,26.297) 36.633,26.297 C5.1 36.724,26.292 36.724,25.157 36.841,25.04 U3.1 ; C20.1@12.997,14.878 13.94,13.935 v1(14.602,13.935) C17.1
  Bottom Layer w1: v1(14.602,13.935) 20.5,13.935 ; v1(15.1,25.5) 16.552,24.048 20.5,24.048 ; v1(28.123,15.028) 27.03,13.935 20.5,13.935 ; v1(33.661,15.287) 35.6,15.287 35.75,15.437 ; v1(34.706,30.556) 32.94,28.79 ; v1(35.75,6.037) v1(35.75,10.074) v1(35.75,14.112) 35.75,15.437 ; v1@35.75,26.297 35.75,24.04 v1(35.75,22.248) v1(35.75,18.184) 35.75,15.437 ; v1(35.793,26.297) 35.75,26.34 33.3,28.79 32.94,28.79 ; 20.5,13.935 20.5,24.048 ; 20.5,24.048 v1(27.1,24.048) 28.143,24.048 29.602,25.507 v1(29.602,28.79) 32.94,28.79
+5V: C23.1 F1.2 R39.2 R42.2 R45.2 U10.5 U11.1 U11.3
+5VOUT: J1.19 Q2.3 R41.2 | length 31.7
  Top Layer w0.2: Q2.3 26.665,7.468 R41.2
  Top Layer w0.75: 26.665,3.106 26.665,2.085 27.5,1.25 48.619,1.25 49.69,2.321 J1.19@49.69,5.07
D_N: J2.A7 J2.B7 R49.2 U10.6 | length 9.6
  Top Layer w0.2: J2.B7@6,17.25 5.157,17.25 5.153,17.254 4.716,17.254 4.408,16.945 4.408,16.509 4.716,16.2 5.95,16.2 6.023,16.273 7.063,16.273 7.552,16.762 7.835,16.762 8.347,16.25 R49.2 8.371,15.476 9.418,14.429 9.83,14.429 U10.6
D_P: J2.A6 J2.B6 R48.2 U10.1 | length 8.8
  Top Layer w0.2: v1(4.925,15.673) 4.964,15.712 5.962,15.712 6,15.75 6.863,15.75 7.774,14.839 U10.1 ; v1(4.935,16.727) 4.946,16.738 5.988,16.738 6,16.75 6.023,16.727 6.875,16.727 7.364,17.216 7.835,17.216 8.347,17.728 R48.2
  Bottom Layer w0.2: v1(4.925,15.673) 4.93,15.678 4.93,16.722 v1(4.935,16.727)
DATA1: U1.43 U1.53 U2.2 | length 34.4
  Top Layer w0.2: v1(13.354,20.378) U1.53 ; U1.43 v1(19,26.548) ; v1(28.076,26.497) 28.617,25.956 34.168,25.956 36.804,28.592 37.027,28.592 37.1,28.665 37.428,28.665 U2.2
  Bottom Layer w0.2: v1(13.354,20.378) 13.354,25.487 14.415,26.548 v1(19,26.548) 19.025,26.522 28.051,26.522 v1(28.076,26.497)
DATA2: U1.41 U2.3 | length 20.7
  Top Layer w0.2: v1(19.65,25.507) 19.696,25.507 20,25.203 U1.41 ; v1(28,25.507) 28.076,25.431 34.181,25.431 36.934,28.184 37.447,28.184 U2.3
  Bottom Layer w0.2: v1(19.65,25.507) 19.661,25.507 20.151,25.996 27.511,25.996 v1(28,25.507)
DATA3: U1.23 U3.2 | length 16.5
  Top Layer w0.2: U1.23 27.133,17.878 27.25,17.995 v1(27.25,19.055) ; v1(33.004,24.75) 33.112,24.75 33.323,24.54 U3.2
  Bottom Layer w0.2: v1(27.25,19.055) 29.764,19.055 33.004,22.295 v1(33.004,24.75)
DATA4: U1.40 U3.3 | length 18.7
  Top Layer w0.2: U1.40 v1(20.5,25.469) ; v1(27.1,25.452) 28.512,24.04 U3.3
  Bottom Layer w0.2: v1(20.5,25.469) 20.538,25.507 27.045,25.507 v1(27.1,25.452)
DATA5: R8.1 U1.39 | length 16.4
  Top Layer w0.2: U1.39 21,22.664 22.064,21.6 23.217,21.6 23.604,21.986 23.604,22.834 v1(23.527,22.911) ; v1(31.747,22.693) 32.408,22.031 32.408,21.39 32.812,20.987 R8.1
  Bottom Layer w0.2: v1(23.527,22.911) 23.604,22.834 24.095,22.834 24.227,22.702 31.737,22.702 v1(31.747,22.693)
DATA6: R10.1 U1.35 | length 13.7
  Top Layer w0.2: v1(23,22.184) U1.35 ; v1(31.706,21.78) 31.706,20.742 32.812,19.637 R10.1
  Bottom Layer w0.2: v1(23,22.184) 31.302,22.184 v1(31.706,21.78)
DATA7: R17.1 U1.22 | length 9.2
  Top Layer w0.2: U1.22 26.04,17.337 29.877,17.337 32.836,14.379 R17.1
DATA8: R22.1 U1.21 U1.34 U1.37 | length 23.7
  Top Layer w0.2: U1.37 22,25.354 22.153,25.507 23.196,25.507 23.5,25.203 U1.34 23.55,24.328 23.55,23.633 24.054,23.129 24.054,21.632 23.55,21.128 23.55,17.532 24.204,16.878 U1.21 29.805,16.878 30.122,16.561 30.125,16.561 30.258,16.428 30.258,16.425 31.786,14.897 31.786,12.787 32.812,11.762 R22.1
DATA9: R24.1 U1.27 U1.33 | length 24
  Top Layer w0.2: U1.33 24.05,24.328 24.05,23.878 24.381,23.547 24.381,21.496 24.155,21.271 24.155,19.878 ; v1(24.15,17.995) 24.15,19.278 24.155,19.283 24.155,19.878 ; U1.27 24.155,19.878 ; v1(30.974,14.887) 30.974,14.297 31.085,14.187 31.085,9.577 31.751,8.911 32.711,8.911 R24.1
  Bottom Layer w0.2: v1(24.15,17.995) 27.866,17.995 v1(30.974,14.887)
DATA10: R26.1 U1.28 | length 17.6
  Top Layer w0.2: U1.28 26.05,20.328 26.722,20.328 29.156,17.894 v1(29.156,17.864) ; v1(30.558,12.749) 30.558,8.95 32.096,7.412 R26.1
  Bottom Layer w0.2: v1(29.156,17.864) 29.212,17.809 29.212,17.471 31.786,14.897 31.786,14.015 30.558,12.787 v1(30.558,12.749)
DATA11: U1.36 U1.38 U8.2 | length 32.7
  Top Layer w0.2: U1.38 21.5,23.443 21.653,23.29 22.018,23.29 ; v1@22,22.664 v1(22,22.702) 22.018,22.72 22.018,23.29 ; U1.36 22.5,23.407 22.383,23.29 22.018,23.29 ; v1(30.031,11.522) 30.031,8.687 33.138,5.58 35.353,5.58 36.672,4.262 U8.2
  Bottom Layer w0.2: v1@22.005,22.697 22.005,17.995 23.122,16.878 27.301,16.878 29.504,14.675 29.504,12.049 v1(30.031,11.522)
DATA12: U1.25 U8.3 | length 25.7
  Top Layer w0.2: v1(24.75,17.405) 24.75,18.625 25.002,18.878 U1.25 ; v1(30.335,14.54) 30.335,13.272 29.504,12.44 29.504,8.445 32.949,5 35.267,5 36.505,3.762 U8.3
  Bottom Layer w0.2: v1(24.75,17.405) 27.47,17.405 v1(30.335,14.54)
GND: C1.2 C2.2 C3.2 C4.1 C5.2 C6.1 C7.2 C8.1 C9.2 C10.1 C11.2 C12.1 C13.2 C14.1 C15.2 C16.1 C17.2 C18.2 C19.2 C20.2 C21.2 C22.2 C23.2 C24.2 C25.2 C26.2 C27.2 C28.2 C29.2 C30.2 C31.2 C32.2 C33.2 J1.4 J1.6 J1.8 J1.10 J1.12 J1.14 J1.16 J1.18 J1.20 J2.A1-B12 J2.B1-A12 P1.6 Q1.2 R1.2 R12.2 R13.2 R14.2 R15.2 R16.2 R19.2 R20.2 R21.2 R34.2 R35.1 R37.2 R38.1 R40.2 R43.2 U1.12 U1.18 U1.60 U1.63 U2.4 U2.5 U3.4 U3.5 U4.4 U5.4 U6.4 U7.4 U8.4 U8.5 U9.4 U10.2 U11.2 Y1.2 Y1.4 | length 6.5
  Top Layer w0.2: v1(7.299,7.76) 7.872,7.76 C23.2 8.227,7.408 8.583,7.764 8.852,7.764 9.145,8.056 9.777,8.056 U11.2 ; R37.2 18.226,2.671 C30.2 ; 41.644,15.004 41.668,15.004 42.25,14.423 42.25,14.369 43.024,13.594 R19.2
  other v1: 20.051,2.143 32.423,2.321 46.933,2.704 39.028,4.012 45.624,6.86 22.75,7.636 45.624,8.36 39.028,8.456 21.052,8.511 15.3,10.552 47,11.1 39.028,12.629 28.627,13.898 46.349,14.097 21.85,15.278 46.349,15.483 39.045,16.5 34.54,17.539 45.525,18.651 22.85,19.528 21.478,20.528 39.028,20.537 34.186,22.593 39.028,24.29 31.397,24.75 34.706,25.125 18.134,25.808 10.35,26.764 24.75,27.503 39.028,28.465 46.599,28.51 27.793,29.363
LED_Gn: R3.1 U1.29 | length 2.9
  Top Layer w0.2: U1.29 27.027,20.878 27.803,20.102 R3.1
LED_Rn: R2.1 U1.30 | length 2.6
  Top Layer w0.2: U1.30 28.469,21.378 R2.1
NetC22_1: C22.1 U1.13 | length 2.5
  Top Layer w0.2: U1.13 22.5,10.602 C22.1
NetC25_1: C25.1 J2.SH1 J2.SH2 J2.SH3 J2.SH4 R1.1 | length 21.6
  Top Layer w0.5: J2.SH3@1.275,20.82 1.328,20.82 1.559,21.051 1.559,22.109 C25.1 1.935,22.986 R1.1
  Bottom Layer w0.5: J2.SH2@5.425,12.18 1.275,12.18 1.275,20.82 J2.SH1@5.425,20.82
NetC26_1: C26.1 U1.47 | length 2.2
  Top Layer w0.2: U1.47 C26.1
NetC27_1: C27.1 U1.31 | length 3
  Top Layer w0.2: U1.31 26.035,21.913 26.739,21.913 27.765,22.94 C27.1
NetC29_1: C29.1 R33.1 R34.1 U1.8 | length 21.1
  Top Layer w0.2: U1.8 20,17.755 v1(22.85,20.605) ; C29.1 21.65,26.548 23.027,26.548 R33.1 24.003,26.524 25.002,25.525 25.002,20.922 v1(24.777,20.697)
  Bottom Layer w0.2: v1(22.85,20.605) 22.896,20.651 24.731,20.651 v1(24.777,20.697)
NetC30_1: C30.1 R36.1 R37.1 U1.9 | length 13.7
  Top Layer w0.2: R36.1 R37.1 18.226,4.122 C30.1 18.298,4.146 v1(19.949,4.146) ; v1(20.15,11.522) 20.15,11.628 20.5,11.978 U1.9
  Bottom Layer w0.2: v1(19.949,4.146) 19.949,4.255 20.15,4.456 v1(20.15,11.522)
NetC31_1: C31.1 R39.1 R40.1 U1.11 | length 31.8
  Top Layer w0.2: v1(3,8.107) R39.1 4.259,8.107 5.258,7.107 5.258,7.101 5.661,6.698 R40.1 5.686,5.265 C31.1 ; v1(13.704,5.265) 13.72,5.25 20.567,5.25 21.783,6.466 21.783,11.547 21.527,11.803 21.527,12.851 U1.11
  Bottom Layer w0.2: v1(3,8.107) 5.857,5.25 13.689,5.25 v1(13.704,5.265)
NetC32_1: C32.1 R41.1 R43.1 U1.14 | length 6.9
  Top Layer w0.2: U1.14 23,11.627 24.225,10.402 C32.1 25.297,8.931 25.297,7.551 R41.1
NetD1_1: D1.1 U9.1 | length 7.5
  Top Layer w0.2: U9.1 26.525,29.525 28,31 31.282,31 32.032,30.25 D1.1
NetD1_2: D1.2 U9.7 | length 2
  Top Layer w0.2: U9.7 30.9,28.265 31.421,28.265 32.106,28.95 D1.2
NetF1_1: F1.1 J2.A4-B9 J2.B4-A9 | length 3.2
  Top Layer w0.3: 4.493,14.204 4.625,14.335 5.225,14.335 5.31,14.25 5.95,14.25 J2.B4-A9@6.1,14.1
  Top Layer w0.4: 4.871,18.332 5.154,18.615 5.271,18.615 5.456,18.8 6,18.8 J2.A4-B9@6.1,18.9
NetJ2_A5: J2.A5 R35.2 | length 5
  Top Layer w0.2: J2.A5@6.1,17.75 6.15,17.8 6.756,17.8 7.552,18.596 7.552,20.626 8.347,21.421 R35.2
NetJ2_B5: J2.B5 R38.2 | length 7.5
  Top Layer w0.2: v1(5.067,14.96) 5.176,14.96 5.336,14.8 6.05,14.8 J2.B5@6.1,14.75 ; v1(8.249,19.05) 8.249,19.877 R38.2
  Bottom Layer w0.2: v1(5.067,14.96) 6,15.893 6,16.801 v1(8.249,19.05)
NetLED1_3: LED1.3 R3.2 | length 5.2
  Top Layer w0.2: R3.2 29.982,17.898 31.62,16.259 32.027,16.259 LED1.3
NetLED1_4: LED1.4 R2.2 | length 5.8
  Top Layer w0.2: R2.2 30.385,21.037 30.569,21.037 30.851,20.754 31,20.605 31,17.628 31.603,17.025 32.111,17.025 LED1.4
NetQ1_1: Q1.1 R32.1 | length 2.8
  Top Layer w0.2: R32.1 29.873,2.649 30.914,3.691 Q1.1
NetQ1_3: Q1.3 R31.2 | length 2.3
  Top Layer w0.2: Q1.3 33.208,3.375 33.934,4.101 R31.2
NetQ2_1: Q2.1 R44.2 R46.2 | length 4.3
  Top Layer w0.2: R46.2 21.25,2.695 22.251,3.696 22.553,3.696 22.956,4.099 R44.2 23.18,4.348 Q2.1
NetQ2_2: Q2.2 R36.2 R42.1 R44.1 R45.1
NetR4_1: R4.1 U2.7 | length 2.6
  Top Layer w0.2: U2.7 41.434,28.715 41.826,29.107 R4.1
NetR5_1: R5.1 U2.6 | length 2.7
  Top Layer w0.2: U2.6 41.326,28.215 41.826,27.715 43.03,27.715 R5.1
NetR6_1: R6.1 U3.7 | length 2.6
  Top Layer w0.2: U3.7 41.49,24.54 41.826,24.876 R6.1
NetR7_1: R7.1 U3.6 | length 2.7
  Top Layer w0.2: U3.6 41.426,24.04 42,23.466 R7.1
NetR8_2: R8.2 U4.2 | length 3.4
  Top Layer w0.2: R8.2 34.387,20.887 35.75,20.887 36.1,20.537 U4.2
NetR9_1: R9.1 U4.7 | length 2.5
  Top Layer w0.2: U4.7 42.94,20.537 R9.1
NetR10_2: R10.2 U4.3 | length 3.4
  Top Layer w0.2: R10.2 35.75,19.637 36.15,20.037 U4.3
NetR11_1: R11.1 U4.6 | length 2.8
  Top Layer w0.2: U4.6 41.93,20.037 42.362,19.604 42.68,19.604 R11.1
NetR17_2: R17.2 U5.3 | length 5.2
  Top Layer w0.2: R17.2 34.287,14.638 35.585,15.937 U5.3
NetR18_1: R18.1 U5.6 | length 2.9
  Top Layer w0.2: U5.6 41.318,15.937 42.25,15.004 R18.1
NetR22_2: R22.2 U6.3 | length 3.3
  Top Layer w0.2: R22.2 34.437,11.912 U6.3
NetR23_1: R23.1 U6.6 | length 2.6
  Top Layer w0.2: U6.6 41.534,11.912 41.784,12.162 43.026,12.162 R23.1
NetR24_2: R24.2 U7.2 | length 3.3
  Top Layer w0.2: R24.2 35.4,8.787 35.75,8.437 U7.2
NetR25_1: R25.1 U7.7 | length 2.9
  Top Layer w0.2: U7.7 41.75,8.437 42.338,9.025 42.71,9.025 R25.1
NetR26_2: R26.2 U7.3 | length 3.5
  Top Layer w0.2: R26.2 34.412,7.287 35.318,7.287 35.968,7.937 U7.3
NetR27_1: R27.1 U7.6 | length 2.5
  Top Layer w0.2: U7.6 43.032,7.937 R27.1
NetR28_1: R28.1 U8.7 | length 2.8
  Top Layer w0.2: U8.7 41.639,4.262 42.338,4.961 42.877,4.961 R28.1
NetR29_1: R29.1 U8.6 | length 3.1
  Top Layer w0.2: U8.6 41.313,3.762 42.371,2.704 42.661,2.704 R29.1
NetR32_2: R32.2 U1.61 | length 29.1
  Top Layer w0.2: U1.61 15.514,16.378 15.642,16.25 v1(15.75,16.25) ; v1(28.5,12.878) 29.131,12.246 29.131,4.117 R32.2
  Bottom Layer w0.2: v1(15.75,16.25) 13.702,14.202 13.702,13.334 13.853,13.184 28.183,13.184 28.489,12.878 v1(28.5,12.878)
NetR46_1: R46.1 U1.59 | length 22.2
  Top Layer w0.2: U1.59 15.472,17.378 15.642,17.547 v1(15.75,17.547) ; v1(19.65,3.198) 20.326,3.198 20.823,3.695 20.847,3.695 21.25,4.098 R46.1
  Bottom Layer w0.2: v1(15.75,17.547) 12.949,14.746 12.949,8.928 16.013,5.863 18.678,3.198 v1(19.65,3.198)
NetR47_1: R47.1 U9.3 U9.5 | length 6.1
  Top Layer w0.2: U9.3 28,27.49 28.65,26.84 U9.5 32.114,26.84 R47.1
NetU1_10: U1.10 U5.5 | length 23.7
  Top Layer w0.2: v1(21,11.698) U1.10 ; v1(34.823,14.36) 34.823,14.37 35.457,15.004 38.595,15.004 39.028,15.437 U5.5
  Bottom Layer w0.2: v1(21,11.698) 21.108,11.698 21.46,12.049 28.077,12.049 29.717,10.41 30.873,10.41 v1(34.823,14.36)
NetU1_15: U1.15 U7.5 | length 20.5
  Top Layer w0.2: U1.15 23.534,12.843 23.534,12.138 v1(24.15,11.522) ; v1(33.934,6.482) 35.45,6.482 35.877,6.909 38.584,6.909 39.112,7.437 U7.5
  Bottom Layer w0.2: v1(24.15,11.522) 26.239,11.522 31.28,6.482 v1(33.934,6.482)
NetU1_16: U1.16 U6.5 | length 18.5
  Top Layer w0.2: U1.16 24,12.595 24.05,12.545 24.333,12.545 25.619,11.258 v1(28.123,11.258) ; v1(33.838,10.004) 34.912,10.004 35.826,10.917 39.286,10.917 39.78,11.412 U6.5
  Bottom Layer w0.2: v1(28.123,11.258) 29.377,10.004 v1(33.838,10.004)
NetU1_17: U1.17 U4.5 | length 24.5
  Top Layer w0.2: v1(22.65,18.528) 22.65,16.878 24.65,14.878 U1.17 ; v1(31.994,18.184) 34.186,18.184 34.935,18.933 39.172,18.933 39.775,19.537 U4.5
  Bottom Layer w0.2: v1(22.65,18.528) 31.65,18.528 v1(31.994,18.184)
nRESET: J1.15 R29.2 R30.2 R31.1 | length 25.4
  Top Layer w0.2: R31.1 34.837,2.627 v1(36.172,2.627) ; R29.2 44.494,3.708 R30.2 45.711,3.711 v1(47,5) ; v1(47,10.15) J1.15@49.69,10.15
  Bottom Layer w0.2: v1(36.172,2.627) 44.627,2.627 v1(47,5) v1(47,10.15)
nTRST: J1.3 R4.2 R9.2 R12.1 | length 16.8
  Top Layer w0.2: R9.2 44.576,20.722 v1(46.021,20.722) ; R12.1 44.646,26.14 v1(46.5,26.14) ; R4.2 44.797,28.81 45.21,28.81 46.5,27.52 v1(46.5,26.14) ; J1.3@49.69,25.39 47.25,25.39 v1(46.5,26.14)
  Bottom Layer w0.2: v1(46.021,20.722) 46.021,25.661 v1(46.5,26.14)
OSC_IN: C1.1 U1.5 Y1.1 | length 6.7
  Top Layer w0.2: Y1.1 16.875,7.011 17.85,7.986 17.85,10.25 C1.1 18.052,11.25 18.5,11.698 U1.5
OSC_OUT: C2.1 U1.6 Y1.3 | length 4.8
  Top Layer w0.2: Y1.3 19.35,9.011 19.35,10.154 C2.1 19.607,10.493 19.607,11.091 19,11.698 U1.6
RTCK: J1.11 R16.1 R25.2 | length 13.8
  Top Layer w0.2: R25.2 44.537,9.4 v1(45.723,9.4) ; R16.1 44.585,16.5 v1(45.611,16.5) ; v1(45.611,14.75) 49.21,14.75 J1.11@49.69,15.23
  Bottom Layer w0.2: v1(45.611,16.5) v1(45.611,14.75) 45.679,14.682 45.679,9.444 v1(45.723,9.4)
RX: J1.17 R20.1 R27.2 | length 6.7
  Top Layer w0.2: R20.1 R27.2 44.843,7.61 J1.17@49.69,7.61